# Altium PCB ECEN5730_brd1a_2023_02_02.PcbDoc
Units mil, origin at the board's own origin, x right, y up, seen from the top; angles counter-clockwise.
Board outline 3500 x 2000 mil, 2 copper layers (Top Layer, Bottom Layer), stack 61.756 mil thick; 22 components, 12 nets, 57 pads, 11 vias.
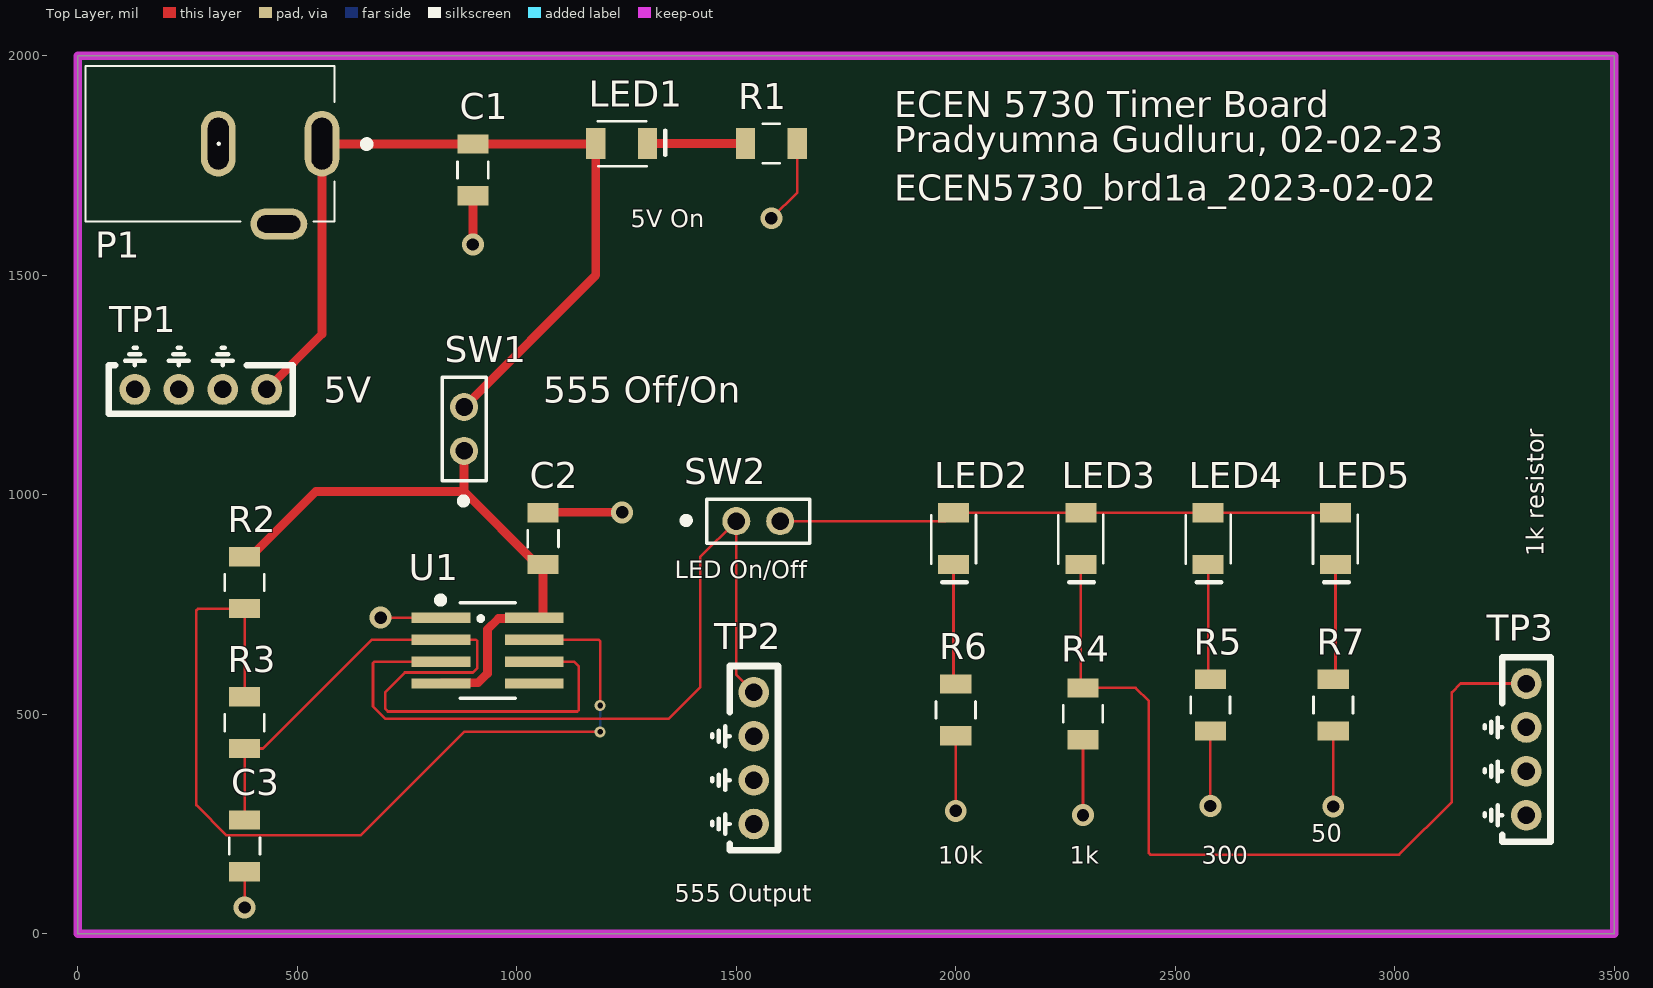
[diagram p0: Top Layer view]
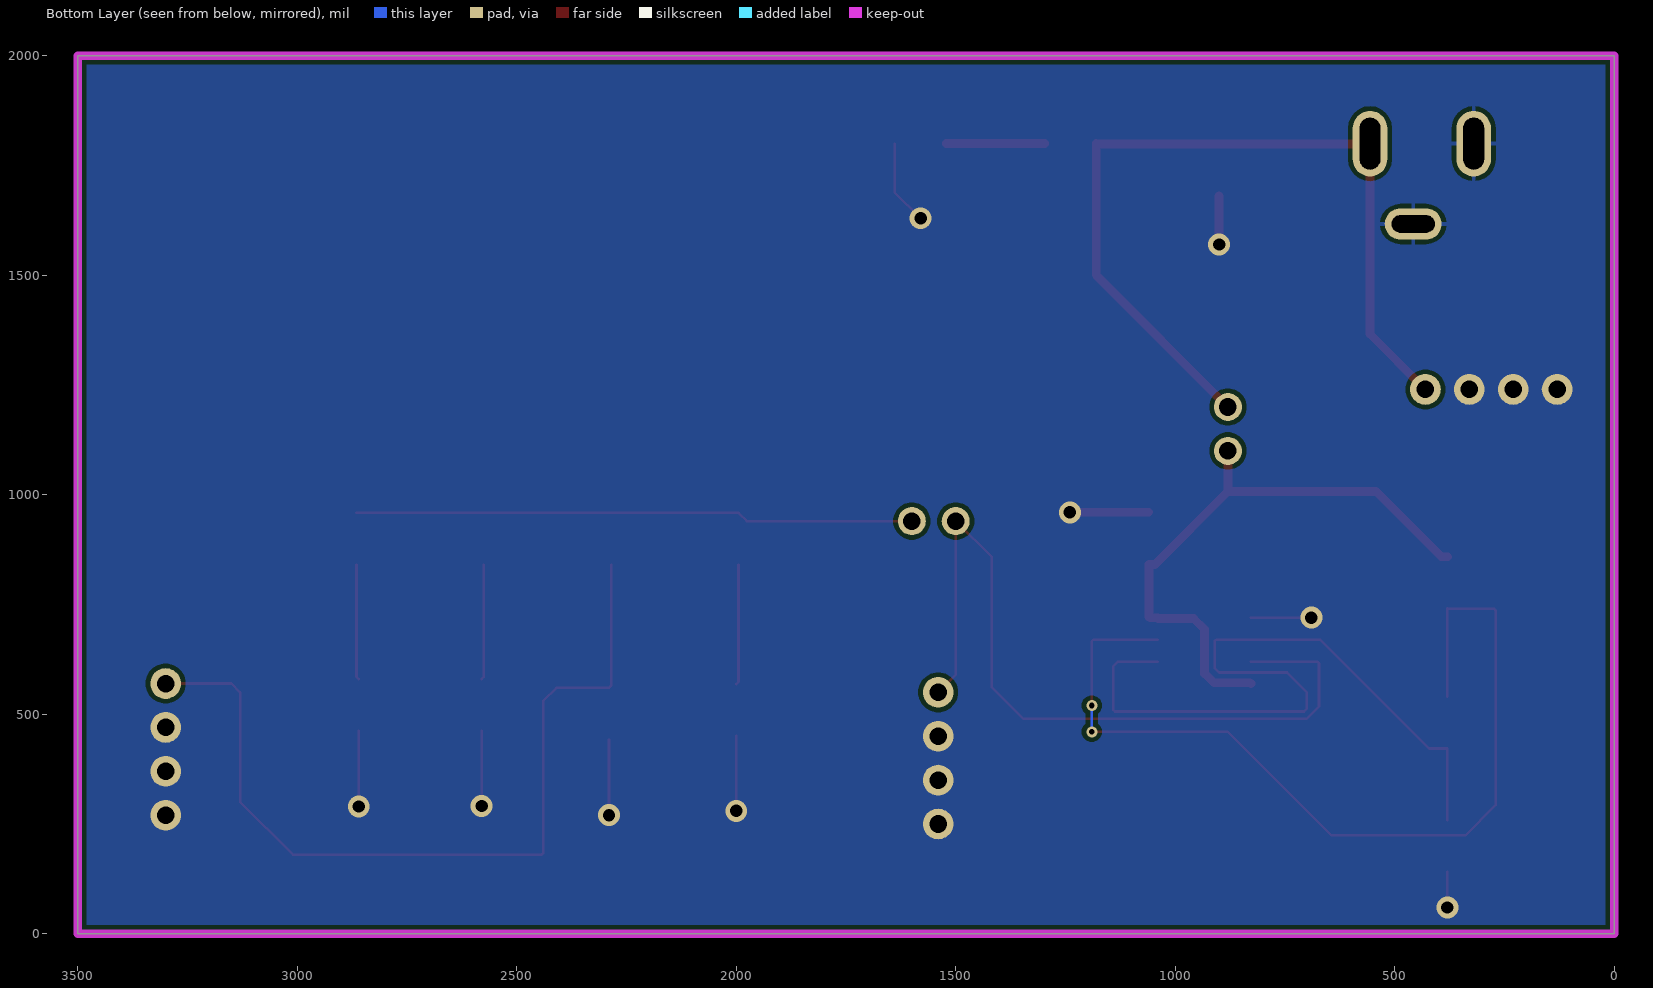
[diagram p1: Bottom Layer view, seen from below]
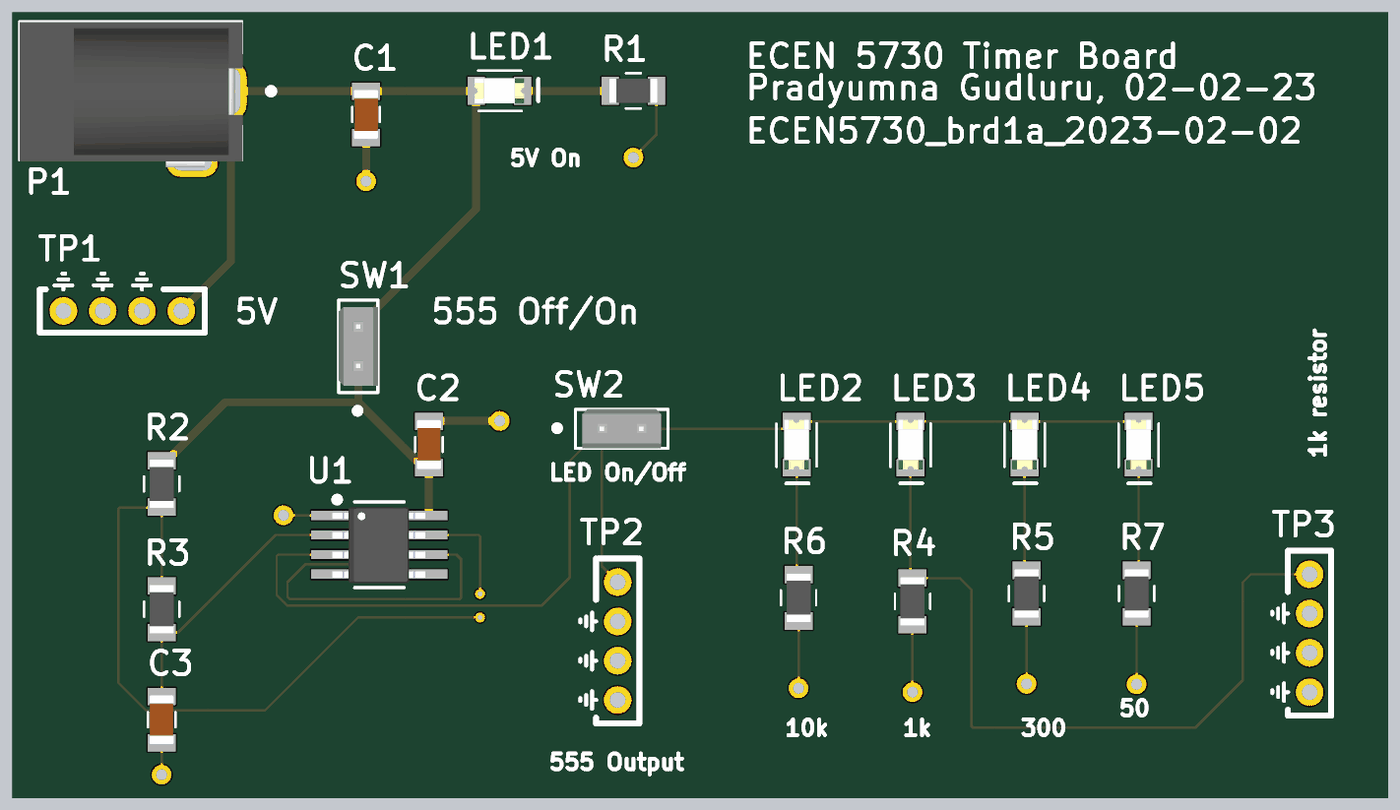
[diagram p2: 3D render of the assembled board from above, using the file's embedded part models]

## Layer stack, top to bottom
Top Solder: solder mask 1, SM-001, Dk 4
Top Layer: signal copper 1.378
Dielectric 1: core 59, Core-043, Dk 4.3
Bottom Layer: signal copper 1.378
Bottom Solder: solder mask 1, SM-001, Dk 4

## Board outline
0,0 3500,0 3500,2000 0,2000

## Design rules (kind name [scope] priority, off if disabled: settings)
Clearance [All] p1: gap=10 ignorepadtopadclearanceinfootprint=FALSE except(0: Arc-Hole Track-Hole SMDPad-Hole THPad-Hole Via-Hole Fill-Hole Poly-Hole Region-Hole Text-Hole)
PlaneClearance [All] p1: clearance=10
PlaneConnect [All] p1: planeconnectstyle=Direct reliefexpansion=20 reliefentries=4 reliefconductorwidth=10 reliefairgap=10
PolygonConnect [All] p1: connectstyle=Direct reliefconductorwidth=10 reliefentries=4 polygonreliefangle="90 Angle" airgapwidth=10
RoutingVias [All] p1: holewidth=13 width=25 viastyle="Through Hole" minholewidth=13 minwidth=25 maxholewidth=60 maxwidth=80
SolderMaskExpansion [All] p1: expansion=4 istentingtop=FALSE
UnRoutedNet [All] p1: checkbadconnections=TRUE
Width "Schematic Width Constraint_1" [InNet('+5')] p1: maxlimit=100 minlimit=10 preferedwidth=20 minimp=50.000000 maximp=50.000000 favimp=50.000000
Width "Schematic Width Constraint" [InNet('555_5V')] p2: maxlimit=100 minlimit=10 preferedwidth=20 minimp=50.000000 maximp=50.000000 favimp=50.000000
Width [All] p3: maxlimit=100 minlimit=6 preferedwidth=6 minimp=50.000000 maximp=50.000000 favimp=50.000000
27 further rules are at their usual default settings.

## Components (designator, comment, footprint, x,y, rotation, side; value= is the part's Value field where it differs from the comment)
C1 "22uF" 1206_Passive_Capacitor 900,1740 r90 top
C2 "22uF" 1206_Passive_Capacitor 1060,900 r270 top
C3 "1uF" 1206_Passive_Capacitor 380,200 r90 top
LED1 "Red" LED_1206 1239,1800 r0 top
LED2 "Red" LED_1206 1995,900 r270 top
LED3 "Red" LED_1206 2285,900 r270 top
LED4 "Red" LED_1206 2575,900 r270 top
LED5 "Red" LED_1206 2865,900 r270 top
P1 "Power Jack" Power_Jack 556.22,1800 r180 top value="CONN PWR JACK 2X5.5MM SOLDER"
R1 "1k" 1206_Passive_Resitor 1580,1800 r180 top value="1K Ohm"
R2 "1k" 1206_Passive_Resitor 380,800 r90 top value="1K Ohm"
R3 "1k" 1206_Passive_Resitor 380,481 r90 top value="1K Ohm"
R4 "1k" 1206_Passive_Resitor 2290,501 r90 top value="1K Ohm"
R5 "300 Ohm" 1206_Passive_Resitor 2580,521 r90 top value=300Ohm
R6 "10k" 1206_Passive_Resitor 2000,510 r90 top
R7 "1M" 1206_Passive_Resitor 2860,521 r90 top value=50
SW1 "SW_555_Off/On" 2Pin-Header-Conn 880,1100 r90 top
SW2 "SW_LED_Off/On" 2Pin-Header-Conn 1500,940 r0 top
TP1 "TP_5V" TP10x_Probe 280,1240 r180 top
TP2 "TP_555_Output" TP10x_Probe 1540,400 r270 top
TP3 "TP_LED_Current" TP10x_Probe 3300,420 r270 top
U1 "LMC555CMX/NOPB" TS555IDTTR 933.7,645 r0 top

## Footprints (in the part's own frame and the unit in brackets; to place one, negate y for a bottom-side part, rotate by r counter-clockwise, add the part's x,y. Pads: shape width x height; smd on the part's side, far side on the other; paste and mask are expansions set on the pad)
2Pin-Header-Conn [mm]
  round 1.62 hole 1.02: 1(0,0) 2(2.54,0)
  silkscreen extent -3.03,-1.27 4.26,1.26, body extent -1.27,-1.27 3.81,1.27, height 8.13
1206_Passive_Capacitor [mil]
  rect 44x71 smd: 1(-59,0) 2(59,0)
  silkscreen extent -19,-35 19,35, body extent -63,-31 63,32, height 50
1206_Passive_Resitor [mil]
  rect 44x71 smd: 1(-59,0) 2(59,0)
  silkscreen extent -19,-45 19,45, body extent -61,-31 61,31, height 26
LED_1206 [mil]
  rect 44x71 smd: 1(-59,0) 2(59,0)
  silkscreen extent -54,-51 99,51, body extent -63,-31 63,31, height 28
Power_Jack [mm]
  oval 2x3.8 hole 1.2 slot 3 at 90 deg: 1(0,0) 2(6,0)
  oval 3.3x1.8 hole 1 slot 2.5 at 0 deg: 3(2.5,4.65)
  silkscreen extent -2.79,-4.5 13.68,4.5, body extent -0.76,-4.45 13.64,4.95, height 11.49
TP10x_Probe [mil] "Small Probs footprint"
  round 70 hole 40: 1(-150,0) 2(-50,0) 2(50,0) 2(150,0)
  silkscreen extent -210,-95 210,55
TS555IDTTR [mm] "IC OSC Single Timer 2.7MHz 8SOIC"
  rect 3.4x0.6 smd: 1(-2.7,1.905) 2(-2.7,0.635) 3(-2.7,-0.635) 4(-2.7,-1.905) 5(2.7,-1.905) 6(2.7,-0.635) 7(2.7,0.635) 8(2.7,1.905)
  silkscreen extent -2.85,-2.77 1.6,3.05, body extent -3.03,-2.48 2.96,2.43, height 1.75

## Part data
C1 C2: library part C_22uF_1206, "22uF ±10% 25V X5R 1206 Multilayer Ceramic Capacitors MLCC - SMD/SMT RoHS", LCSC Part#=C12891, MFR Part #=CL31A226KAHNNNE, Datasheet=https://datasheet.lcsc.com/lcsc/1811031514_Samsung-Electro-Mechanics-CL31A226KAHNNNE_C12891.pdf, Type=basic
C3: library part C_1uF_1206, "MULTILAYER CERAMIC CAPACITORS MLCC - SMD/SMT 1UF 50V 1206 ROHS", LCSC Part#=C1848, MFR Part #=CL31B105KBHNNNE, Digikey Link=https://www.digikey.com/product-detail/en/C1206C105M4RACTU/399-8150-1-ND/3471873/?itemSeq=304982366, Type=Basic
LED1 LED2 LED3 LED4 LED5: library part LED_RED_1206, "Red 621~631nm 1206 Light Emitting Diodes (LED) RoHS", LCSC Part#=C93133, MFR Part #=15-21/R6C-FQ1R1B/2T, Datasheet=https://datasheet.lcsc.com/szlcsc/1811151241_Everlight-Elec-15-21-R6C-FQ1R1B-2T_C93133.pdf, Type=Extended
P1: library part "P_Power Jack", "Power Barrel Connector Jack 2.10mm ID (0.083\"), 5.50mm OD (0.217\") Through Hole, Right Angle", LCSC Part#=C136744, MFR Part #=PJ-102A, Digikey Link=https://www.digikey.com/product-detail/en/PJ-102A/CP-102A-ND/275425/?itemSeq=304982367, Type=Extended
R1 R2 R3 R4: library part R_1K_1206, "CHIP RESISTOR - SURFACE MOUNT 1KOHMS ±1% 1/4W 1206 ROHS", LCSC Part#=C4410, MFR Part #=RNCP1206FTD1K00CT, Digikey Link=https://www.digikey.com/product-detail/en/RNCP1206FTD1K00/RNCP1206FTD1K00CT-ND/2240675/?itemSeq=304982373, Type=Basic
R5: library part R_300Ohm_1206, "CHIP RESISTOR - SURFACE MOUNT 300OHMS ±1% 1/4W 1206 ROHS", LCSC Part#=C17887, MFR Part #=1206W4F3000T5E, Datasheet=https://datasheet.lcsc.com/szlcsc/Uniroyal-Elec-1206W4F3000T5E_C17887.pdf, Type=Basic
R6 R7: library part R_1M_1206, "CHIP RESISTOR - SURFACE MOUNT 1MOHMS ±1% 1/4W 1206 ROHS", LCSC Part#=C17927, MFR Part #=RMCF1206JT1M00, Digikey Link=https://www.digikey.com/product-detail/en/RMCF1206JT1M00/RMCF1206JT1M00CT-ND/1942830/?itemSeq=304982358, Type=Basic
SW1 SW2: library part SW_2Pin_100mil_Switch, "2Pin Header", LCSC Part#=C124375, Type=Extended
TP1 TP2 TP3: library part TP_10x_Probe, "Test Point 300 mil centers"
U1: library part U_555_Fast, "555 Type, Timer/Oscillator _Single_ IC 3MHz 8-SO", LCSC Part#=C90760, Package=SOIC-8, Digikey Link=https://www.digikey.com/product-detail/en/texas-instruments/LMC555CMX-NOPB/LMC555CMX-NOPBCT-ND/1010550, MFR Part #=LMC555CMX/NOPB, Type=Extended

## Via types
v1: diameter 50, hole 28, Top Layer to Bottom Layer, 9 vias
v2: diameter 25, hole 13, Top Layer to Bottom Layer, 2 vias

## Nets (pads, with @x,y where several pads share a name; then routed paths per layer and width w, separated by ;. In a path a pad name is that pad's centre, name@x,y a point inside that pad or via, vN(x,y) a via of type N, cw(c..) or ccw(c..) an arc to the next point about the centre after c; other vN are vias at no path point)
555_5V: C2.2 R2.2 SW1.1 U1.4 U1.8 | length 1376.2
  Top Layer w20: R2.2 393.5,859 542,1007.5 880,1007.5 ; U1.4 829.21,571.81 911.81,571.81 933,593 933,693 958.19,718.19 1038.19,718.19 U1.8 1058.19,720 1060,721.81 C2.2 1046.5,841 880,1007.5 ; SW1.1 880,1007.5
555_Output: SW2.1 TP2.1 U1.3 | length 1861
  Top Layer w6: U1.3 675.96,620 672.44,616.49 672.44,517.56 700,490 1346.49,490 1417.71,561.23 1417.71,857.71 SW2.1 1500,590 TP2.1
+5: C1.2 LED1.1 P1.1 SW1.2 TP1.1 | length 1961.2
  Top Layer w20: TP1.1 556.22,1366.22 P1.1 557.22,1799 C1.2 1179,1799 LED1.1 1180,1500 SW1.2
GND: C1.1 C2.1 C3.1 P1.2 P1.3 R1.1 R4.1 R5.1 R6.1 R7.1 TP1.2 TP2.2 TP3.2 U1.1 | length 1390.3
  Top Layer w6: v1(380,60) C3.1 ; v1(690,720) U1.1 ; C2.1 C2.1@1061,960 ; v1(1580,1630) 1639,1689 R1.1 ; v1(2000,280) R6.1 ; v1(2290,270) R4.1 ; v1(2580,291) R5.1 ; v1(2860,290) R7.1
  Top Layer w20: v1(900,1570) C1.1 ; C2.1@1061,960 v1(1240,960)
NetC3_2: C3.2 R3.1 U1.2 U1.6 | length 1778.6
  Top Layer w6: C3.2 R3.1 422,422 670,670 U1.2 906.49,670 910,666.49 910,605.47 899.72,595.19 745.19,595.19 700,550 700,512.63 706.31,506.31 1137.69,506.31 1141.2,509.83 1141.2,608.8 1130,620 U1.6
NetLED1_2: LED1.2 R1.2 | length 223
  Top Layer w20: LED1.2 R1.2
NetLED2_1: LED2.1 LED3.1 LED4.1 LED5.1 SW2.2 | length 1272.9
  Top Layer w6: SW2.2 1976,940 LED2.1 LED3.1 LED4.1 LED5.1
NetLED2_2: LED2.2 R6.2 | length 274.1
  Top Layer w6: LED2.2 1995,574 R6.2
NetLED3_2: LED3.2 R4.2 TP3.1 | length 1961.4
  Top Layer w6: LED3.2 2285,565 R4.2 2410,560 2440,530 2440,183.51 2443.51,180 3010,180 3130,300 3130,550 3150,570 TP3.1
NetLED4_2: LED4.2 R5.2 | length 263.1
  Top Layer w6: LED4.2 2575,585 R5.2
NetLED5_2: LED5.2 R7.2 | length 263.1
  Top Layer w6: R7.2 2865,585 LED5.2
NetR2_1: R2.1 R3.2 U1.7 | length 2160.6
  Top Layer w6: R3.2 R2.1 379,740 273.51,740 270,736.49 270,293.12 339.12,224 643.99,224 879.99,460 v2(1190,460) ; U1.7 1186.49,670 1190,666.49 v2(1190,520)
  Bottom Layer w6: v2(1190,460) v2(1190,520)
pads on no net: U1.5

## Polygon pours and split planes (outlines as drawn)
GND on Bottom Layer "GND_L02_P000" (solid, pour order 0): 0,2000 3500,2000 3500,0 0,0

## Keep-outs
Keep-Out Layer:
  the board outline again, w20

## Silkscreen, mask and mechanical layers (free items; w line width, h text height)
Top Overlay:
  text "ECEN 5730 Timer Board" at 1860,1860 h60
  text "Pradyumna Gudluru, 02-02-23" at 1860,1779.99 h60
  text "ECEN5730_brd1a_2023-02-02" at 1860,1670 h60
  text "5V On" at 1260,1610 h40
  text "5V" at 560,1210 h60
  text "555 Off/On" at 1060,1210 h60
  text "1k resistor" at 3340,860 h40 r90
  text "LED On/Off" at 1360,810 h40
  text "50" at 2810,210 h40
  text "10k" at 1960,160 h40
  text "1k" at 2260,160 h40
  text "300" at 2560,160 h40
  text "555 Output" at 1360,73.33 h40